# Altium PCB PCB_闹钟_2022-10-18.pcbdoc
Units mil, origin at the board's own origin, x right, y up, seen from the top; angles counter-clockwise.
Board outline 4907.63 x 4907.63 mil, 2 copper layers (Top Layer, Bottom Layer); 31 components, 134 nets, 306 pads, 29 vias.
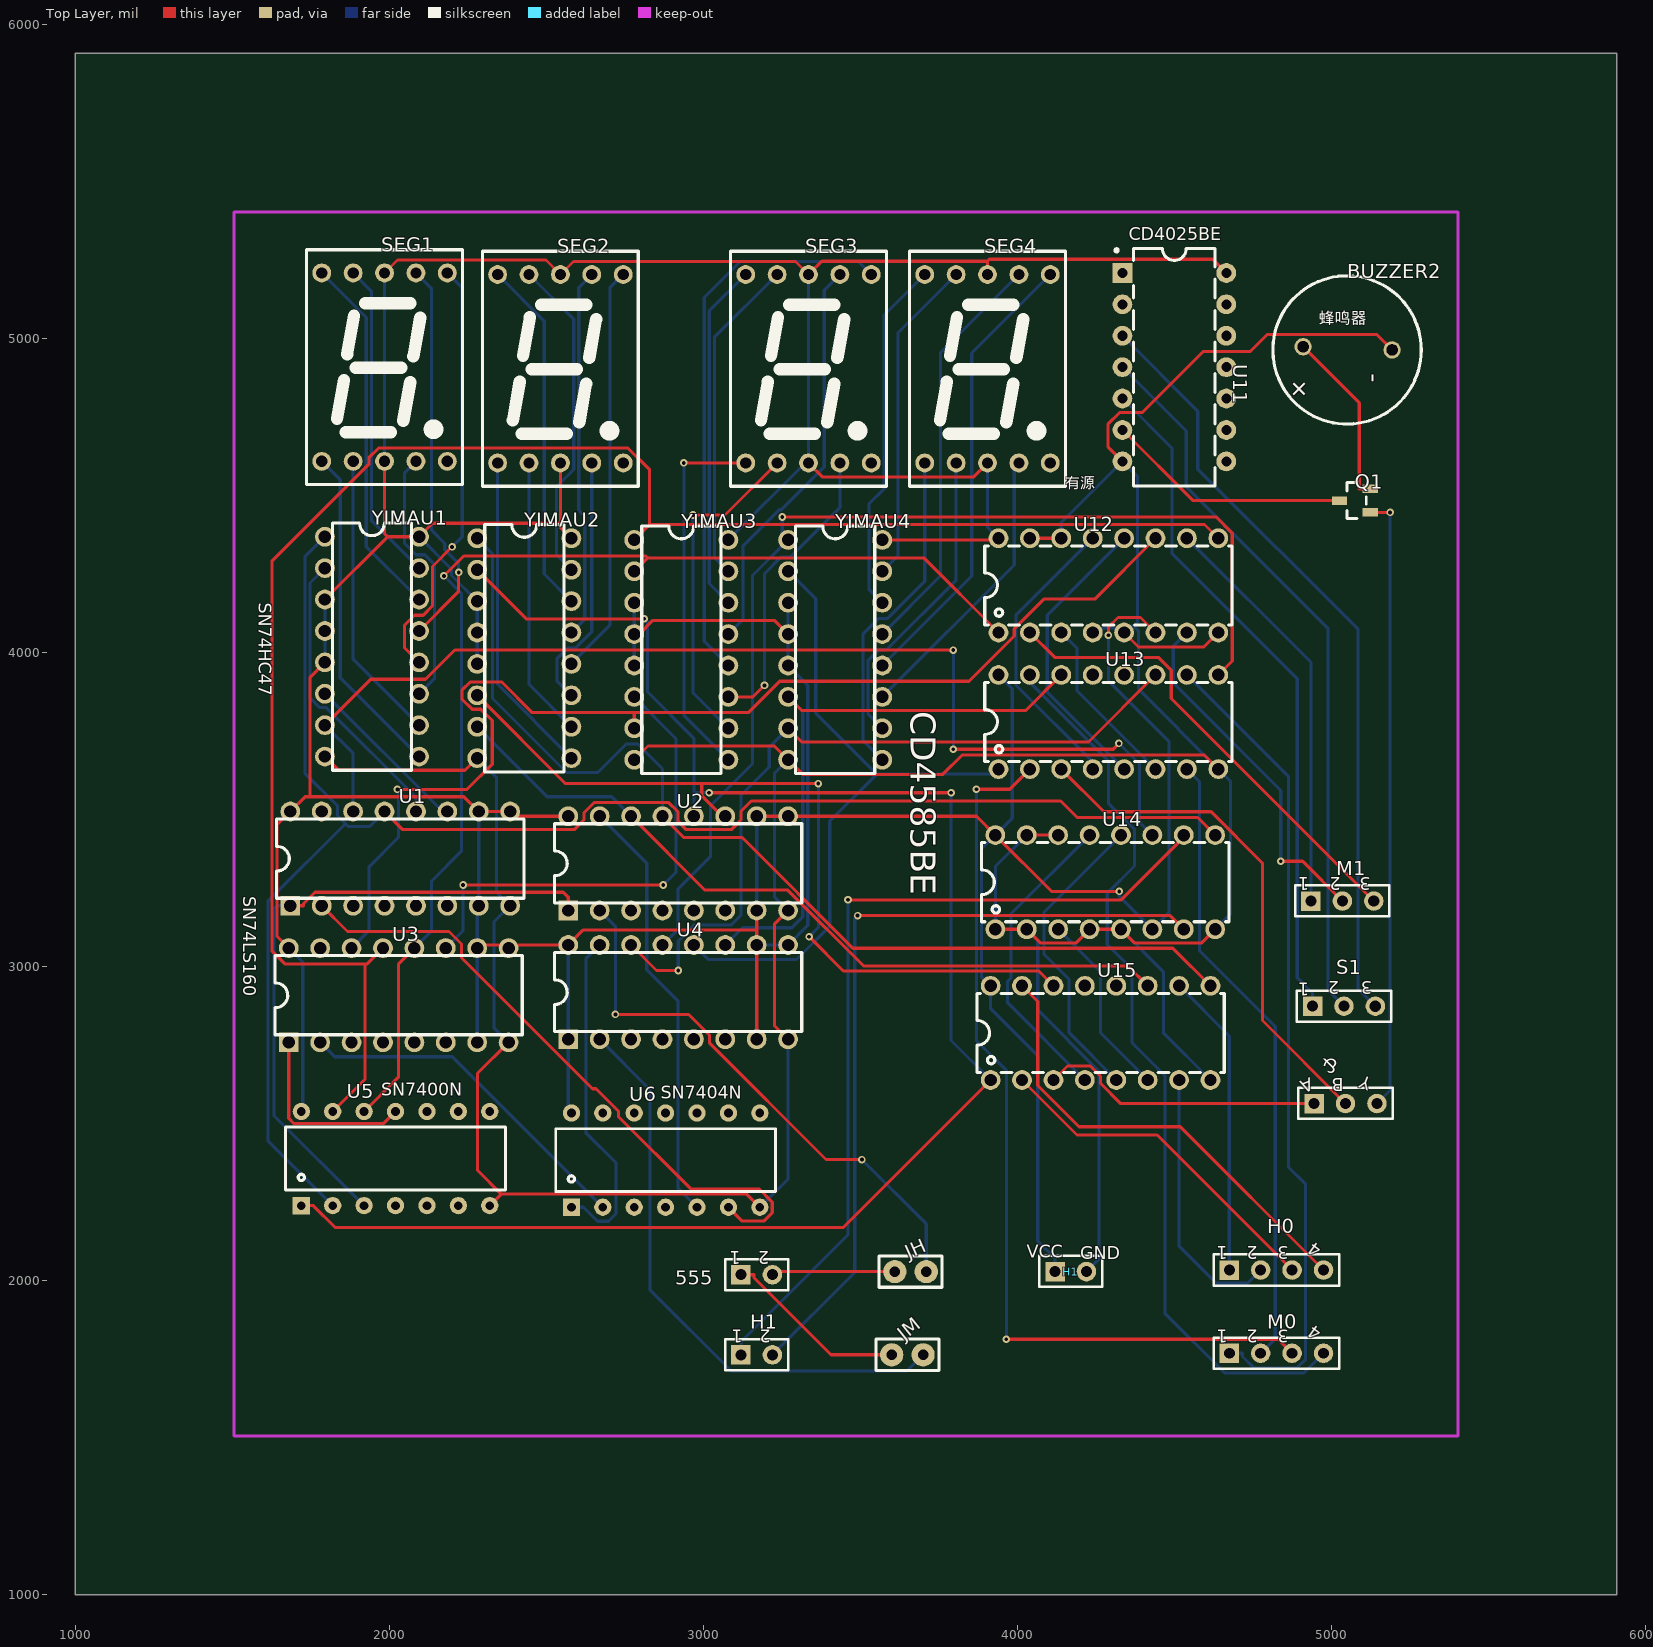
[diagram p0: Top Layer view]
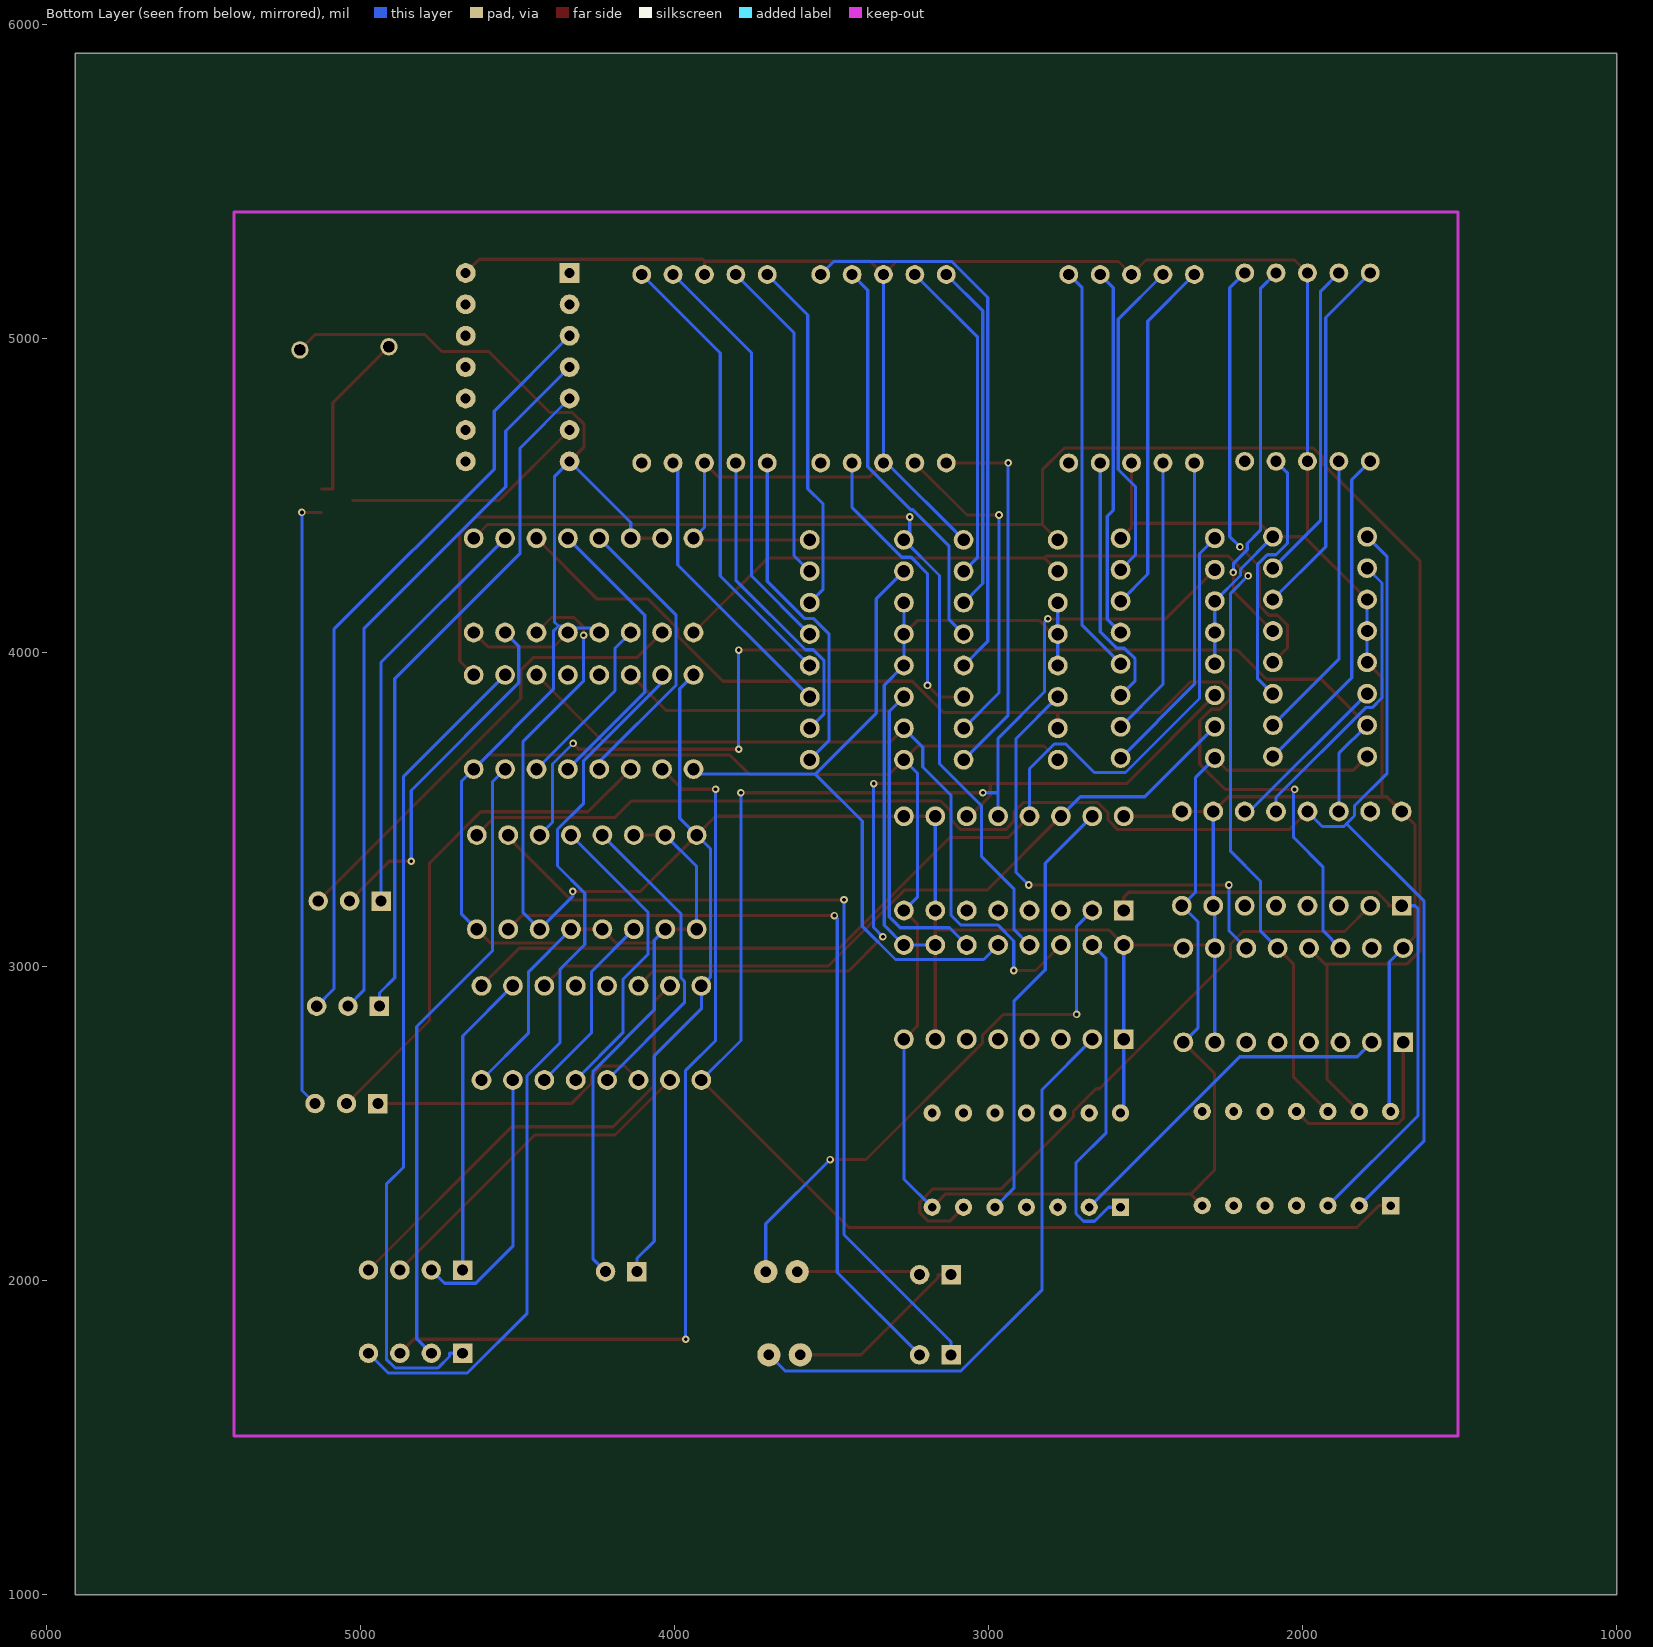
[diagram p1: Bottom Layer view, seen from below]

## Layer stack, top to bottom
Top Solder: solder mask 0.4, Solder Resist, Dk 3.5
Top Layer: signal copper 1.4
Dielectric1: dielectric 12.6, FR-4, Dk 4.8
Bottom Layer: signal copper 1.4
Bottom Solder: solder mask 0.4, Solder Resist, Dk 3.5

## Board outline
5907.63,1000 1000,1000 1000,5907.63 5907.63,5907.63

## Design rules (kind name [scope] priority, off if disabled: settings)
Clearance [All] p1: gap=10 ignorepadtopadclearanceinfootprint=FALSE except(0: Arc-Hole Track-Hole SMDPad-Hole THPad-Hole Via-Hole Fill-Hole Poly-Hole Region-Hole Text-Hole)
PolygonConnect [All] p1: connectstyle=Relief reliefconductorwidth=10 reliefentries=4 polygonreliefangle="90 Angle" airgapwidth=10
RoutingVias [All] p1: holewidth=28 width=50 viastyle="Through Hole" minholewidth=28 minwidth=50 maxholewidth=28 maxwidth=50
SolderMaskExpansion [All] p1: expansion=4 istentingtop=FALSE
Width [All] p1: maxlimit=10 minlimit=10 preferedwidth=10
30 further rules are at their usual default settings.

## Components (designator, comment, footprint, x,y, rotation, side; value= is the part's Value field where it differs from the comment)
555 "HDR-F-2.54_1x2" HDR-F-2.54_1X2 3169.41,2018.54 r0 top
& "HDR-F-2.54_1x3" HDR-F-2.54_1X3 5044.41,2563.54 r0 top
BUZZER2 "有源蜂鸣器3v" ?#1 5049.41,4963.54 r0 top
H0 "HDR-F-2.54_1x4" HDR-F-2.54_1X4 4824.41,2033.54 r0 top
H1 "HDR-F-2.54_1x2" HDR-F-2.54_1X2 4169.41,2028.54 r0 top
H1 "HDR-F-2.54_1x2" HDR-F-2.54_1X2 3169.41,1763.54 r0 top
JH "排针2P" ?#2 3659.41,2028.54 r0 top
JM "排针2P" ?#2 3649.41,1763.54 r0 top
M0 "HDR-F-2.54_1x4" HDR-F-2.54_1X4 4824.41,1768.54 r0 top
M1 "HDR-F-2.54_1x3" HDR-F-2.54_1X3 5034.41,3208.54 r0 top
Q1 "2N3904(SOT-23)" SOT-23-3_L2.9-W1.3-P1.90-LS2.4-TR 5074.41,4483.54 r0 top
S1 "HDR-F-2.54_1x3" HDR-F-2.54_1X3 5039.41,2873.54 r0 top
SEG1 "SEG-TH_0.56×1_Anode" LED-SEG-TH_10P-L12.6-W19.0-P2.54-S15.24-BL 1984.41,4908.54 r0 top
SEG2 "SEG-TH_0.56×1_Anode" LED-SEG-TH_10P-L12.6-W19.0-P2.54-S15.24-BL 2544.41,4903.54 r0 top
SEG3 "SEG-TH_0.56×1_Anode" LED-SEG-TH_10P-L12.6-W19.0-P2.54-S15.24-BL 3334.41,4903.54 r0 top
SEG4 "SEG-TH_0.56×1_Anode" LED-SEG-TH_10P-L12.6-W19.0-P2.54-S15.24-BL 3904.41,4903.54 r0 top
U1 "SN74LS160N" DIP-16#1 2034.41,3343.54 r0 top
U2 "SN74LS160N" DIP-16#1 2919.41,3328.54 r0 top
U3 "SN74LS160N" DIP-16#1 2029.41,2908.54 r0 top
U4 "SN74LS160N" DIP-16#1 2919.41,2918.54 r0 top
U5 "与非门SN7400N" DIP14#1 2019.41,2388.54 r0 top
U6 "非门SN7404N" DIP14#2 2579.41,2233.54 r0 top
U11 "三输入或非CD4025BE" DIP-14_L19.2-W6.6-P2.54-LS10.9-BL 4499.41,4908.54 r270 top
U12 "CD4585BE" DIP-16_L20.0-W6.4-P2.54-LS7.6-BL 4289.41,4213.54 r0 top
U13 "CD4585BE" DIP-16_L20.0-W6.4-P2.54-LS7.6-BL 4289.41,3778.54 r0 top
U14 "CD4585BE" DIP-16_L20.0-W6.4-P2.54-LS7.6-BL 4279.41,3268.54 r0 top
U15 "CD4585BE" DIP-16_L20.0-W6.4-P2.54-LS7.6-BL 4264.41,2788.54 r0 top
YIMAU1 "SN74LS47N" DIP-16#2 1944.41,4018.54 r0 top
YIMAU2 "SN74LS47N" DIP-16#2 2429.41,4013.54 r0 top
YIMAU3 "SN74LS47N" DIP-16#2 2929.41,4008.54 r0 top
YIMAU4 "SN74LS47N" DIP-16#2 3419.41,4008.54 r0 top

## Footprints (in the part's own frame and the unit in brackets; to place one, negate y for a bottom-side part, rotate by r counter-clockwise, add the part's x,y. Pads: shape width x height; smd on the part's side, far side on the other; paste and mask are expansions set on the pad)
DIP14#1 [mil]
  rect 55x55 hole 28: 1(-300,-150)
  round 55 hole 28: 2(-200,-150) 3(-100,-150) 4(0,-150) 5(100,-150) 6(200,-150) 7(300,-150) 8(300,150) 9(200,150) 10(100,150) 11(0,150) 12(-100,150) 13(-200,150) 14(-300,150)
  silkscreen extent -350,-100 350,100
DIP14#2 [mil]
  rect 55x55 hole 28: 1(0,0)
  round 55 hole 28: 2(100,0) 3(200,0) 4(300,0) 5(400,0) 6(500,0) 7(600,0) 8(600,300) 9(500,300) 10(400,300) 11(300,300) 12(200,300) 13(100,300) 14(0,300)
  silkscreen extent -50,50 650,250
DIP-14_L19.2-W6.6-P2.54-LS10.9-BL [mil]
  rect 63x63 hole 32: 1(-300,-165.35)
  round 63 hole 32: 2(-200,-165.35) 3(-100,-165.35) 4(0,-165.35) 5(100,-165.35) 6(200,-165.35) 7(300,-165.35) 8(300,165.35) 9(200,165.35) 10(100,165.35) 11(0,165.35) 12(-100,165.35) 13(-200,165.35) 14(-300,165.35)
  silkscreen extent -378,-189 378,130
DIP-16#1 [mm]
  rect 1.6x1.6 hole 1: 1(-8.89,-3.81)
  round 1.6 hole 1: 2(-6.35,-3.81) 3(-3.81,-3.81) 4(-1.27,-3.81) 5(1.27,-3.81) 6(3.81,-3.81) 7(6.35,-3.81) 8(8.89,-3.81) 9(8.89,3.81) 10(6.35,3.81) 11(3.81,3.81) 12(1.27,3.81) 13(-1.27,3.81) 14(-3.81,3.81) 15(-6.35,3.81) 16(-8.89,3.81)
  silkscreen extent -10,-3.2 10,3.2
DIP-16#2 [mm]
  round 1.6 hole 1: 1(-3.81,8.89) 2(-3.81,6.35) 3(-3.81,3.81) 4(-3.81,1.27) 5(-3.81,-1.27) 6(-3.81,-3.81) 7(-3.81,-6.35) 8(-3.81,-8.89) 9(3.81,-8.89) 10(3.81,-6.35) 11(3.81,-3.81) 12(3.81,-1.27) 13(3.81,1.27) 14(3.81,3.81) 15(3.81,6.35) 16(3.81,8.89)
  silkscreen extent -3.2,-10 3.2,10
DIP-16_L20.0-W6.4-P2.54-LS7.6-BL [mm]
  round 1.6 hole 1: 1(-8.89,-3.81) 2(-6.35,-3.81) 3(-3.81,-3.81) 4(-1.27,-3.81) 5(1.27,-3.81) 6(3.81,-3.81) 7(6.35,-3.81) 8(8.89,-3.81) 9(8.89,3.81) 10(6.35,3.81) 11(3.81,3.81) 12(1.27,3.81) 13(-1.27,3.81) 14(-3.81,3.81) 15(-6.35,3.81) 16(-8.89,3.81)
  silkscreen extent -10,-3.2 10,3.2
HDR-F-2.54_1X2 [mil]
  rect 62x62 hole 35: 1(-50,0)
  round 62 hole 35: 2(50,0)
  silkscreen extent -100,-49 100,50
HDR-F-2.54_1X3 [mil]
  rect 62x62 hole 35: 1(-100,0)
  round 62 hole 35: 2(0,0)
  round 62 hole 36: 3(100,0)
  silkscreen extent -150,-49 150,50
HDR-F-2.54_1X4 [mil]
  rect 62x62 hole 35: 1(-150,0)
  round 62 hole 35: 2(-50,0) 3(50,0) 4(150,0)
  silkscreen extent -200,-50 200,50
LED-SEG-TH_10P-L12.6-W19.0-P2.54-S15.24-BL [mil]
  round 60 hole 36: 1(-200,-300) 2(-100,-300) 3(0,-300) 4(100,-300) 5(200,-300) 6(200,300) 7(100,300) 8(0,300) 9(-100,300) 10(-200,300)
  silkscreen extent -248,-374 248,374
SOT-23-3_L2.9-W1.3-P1.90-LS2.4-TR [mm]
  rect 1.25x0.7 smd: 1(1.25,0.95) 2(1.25,-0.95) 3(-1.25,0)
  silkscreen extent -0.65,-1.46 0.9,1.46
?#1 [mm]
  round 1.4 hole 0.9 slot 0.905 at 0 deg: +(-3.556,0.254) -(3.644,0)
  silkscreen extent -6,-6 6,6
?#2 [mm]
  round 1.88 hole 0.864: 1(-1.27,0) 2(1.27,0)
  silkscreen extent -2.54,-1.27 2.54,1.27

## Via types
v1: diameter 24, hole 12, Top Layer to Bottom Layer, 29 vias

## Nets (pads, with @x,y where several pads share a name; then routed paths per layer and width w, separated by ;. In a path a pad name is that pad's centre, name@x,y a point inside that pad or via, vN(x,y) a via of type N, cw(c..) or ccw(c..) an arc to the next point about the centre after c; other vN are vias at no path point)
GND: BUZZER2.- H1.2@4219.41,2028.54 U1.8 U2.8 U3.8 U4.8 U5.7 U6.7 U11.7 U12.4 U12.5 U12.8 U12.14 U12.15 U13.8 U14.1 U14.2 U14.4 U14.5 U14.8 U14.14 U14.15 U15.8 YIMAU1.8 YIMAU2.8 YIMAU3.8 YIMAU4.8 | length 13223.9
  Top Layer w10: YIMAU1.8 1838.16,3624.79 2240.66,3624.79 YIMAU2.8 ; U5.7 2356.1,2275.23 ; U3.8 2280.55,2659.68 2280.55,2350.78 2356.1,2275.23 ; YIMAU3.8 2823.16,3702.29 3225.66,3702.29 YIMAU4.8 3316.24,3611.71 3762.3,3611.71 3824.1,3673.51 4594.44,3673.51 U13.8 ; U6.7 3137.72,2275.23 2356.1,2275.23 ; U4.8 3225.66,2812.29 3225.66,3134.79 U2.8 ; U14.1 U14.2 4073.52,3074.43 4185.3,3074.43 U14.4 U14.5 4373.52,3074.43 4585.3,3074.43 U14.8 ; U14.15 U14.14 ; U12.15 U12.14 ; U11.7 4288.6,4654 4288.6,4727.91 4324.53,4763.84 4396.23,4763.84 4590.93,4958.54 4740.88,4958.54 4795.05,5012.71 5143.7,5012.71 BUZZER2.- ; U12.5 4385.37,4017.58 4593.45,4017.58 U12.8
  Bottom Layer w10: YIMAU2.8 2340.66,3602.29 2340.66,3237.29 U1.8 2332.69,3141.82 2332.69,2805.26 U3.8 ; U6.7 3269.41,2323.54 U4.8 ; U2.8 3225.66,3222.29 3225.66,3614.79 YIMAU4.8 ; U14.1 3929.41,3318.54 U14.15 ; U14.2 4064.41,3083.54 4064.41,2861.79 4259.2,2667 4259.2,2068.33 H1.2@4219.41,2028.54 ; U12.14 4139.41,4413.89 U11.7 4382.49,4560.11 4382.49,4097.18 4369.47,4084.16 ; U12.4 4253.44,4077.57 4325.38,4077.57 U12.5 4360.03,4084.16 4369.47,4084.16 ; U14.5 4464.41,2983.54 4464.41,2788.54 U15.8 ; U14.8 4678.63,3167.76 4678.63,3589.32 U13.8 4385.51,3882.44 4385.51,4068.12 4369.47,4084.16
J1_1: 555.2 JH.1 | length 394.1
  Top Layer w10: 555.2 3229.41,2028.54 JH.1
J2_1: 555.1 JM.1 | length 591.8
  Top Layer w10: 555.1 3161.42,2018.54 3161.42,2008.04 3405.92,1763.54 JM.1
J2_2: JM.2 U4.2 | length 1863
  Bottom Layer w10: U4.2 2829.41,2608.54 2829.41,1970.35 3087.93,1711.83 3647.7,1711.83 JM.2
Q1_1: BUZZER2.+ Q1.1 | length 562.2
  Top Layer w10: BUZZER2.+ 5087.99,4794.96 5087.99,4520.94 Q1.1
Q1_2: &.3 Q1.2 | length 1962.4
  Top Layer w10: Q1.2 5159.23,4446.14 v1(5186.16,4446.14)
  Bottom Layer w10: &.3 5186.16,2605.29 v1(5186.16,4446.14)
S$54: 
S$56: 
S$59: 
SEG1_1: SEG1.1 YIMAU1.9 | length 1068.4
  Bottom Layer w10: SEG1.1 1843.35,4549.6 1843.35,3919.6 YIMAU1.9
SEG1_2: SEG1.2 YIMAU1.10 | length 927
  Bottom Layer w10: SEG1.2 1884.41,3978.54 YIMAU1.10
SEG1_4: SEG1.4 YIMAU1.11 | length 831
  Bottom Layer w10: SEG1.4 2048.46,4572.59 2048.46,4347.08 2084.45,4311.09 2112.04,4311.09 2143.79,4279.34 2143.79,3917.92 YIMAU1.11
SEG1_5: SEG1.5
SEG1_6: SEG1.6 YIMAU1.12 | length 1371.2
  Top Layer w10: YIMAU1.12 2048.06,4014.89 2048.06,4087 2079.6,4118.54 2107.3,4118.54 2136.97,4148.21 2136.97,4273.93 v1(2199.3,4336.26)
  Bottom Layer w10: SEG1.6 2231.82,5161.13 2231.82,4368.78 v1(2199.3,4336.26)
SEG1_7: SEG1.7 YIMAU1.13 | length 1248.6
  Top Layer w10: YIMAU1.13 2220.46,4194.59 v1(2220.46,4254.81)
  Bottom Layer w10: SEG1.7 2134.41,5158.54 2134.41,4388.73 2176.25,4346.89 2176.25,4326.72 2220.46,4282.51 v1(2220.46,4254.81)
SEG1_9: SEG1.9 YIMAU1.15 | length 1027
  Bottom Layer w10: SEG1.9 1942.43,5150.52 1942.43,4420.52 YIMAU1.15
SEG1_10: SEG1.10 YIMAU1.14 | length 1168.4
  Bottom Layer w10: SEG1.10 1926.37,5066.58 1926.37,4336.58 YIMAU1.14
SEG2_1: SEG2.1 YIMAU2.9 | length 1037.3
  Bottom Layer w10: SEG2.1 2344.41,3898.54 YIMAU2.9
SEG2_2: SEG2.2 YIMAU2.10 | length 895.9
  Bottom Layer w10: SEG2.2 2444.41,3898.54 YIMAU2.10
SEG2_4: SEG2.4 YIMAU2.11 | length 819.5
  Bottom Layer w10: YIMAU2.11 2533.32,3909.63 2533.32,3979.47 2567.39,4013.54 2591.91,4013.54 2644.41,4066.04 SEG2.4
SEG2_5: SEG2.5
SEG2_6: SEG2.6 YIMAU2.12 | length 1308.3
  Bottom Layer w10: YIMAU2.12 2702.1,4086.23 2702.1,5161.23 SEG2.6
SEG2_7: SEG2.7 YIMAU2.13 | length 1182.9
  Bottom Layer w10: YIMAU2.13 2622.1,4106.23 2622.1,4434.16 2602.79,4453.47 2602.79,5161.92 SEG2.7
SEG2_9: SEG2.9 YIMAU2.15 | length 1041.2
  Bottom Layer w10: SEG2.9 2586.73,5061.22 2586.73,4582.84 2532.13,4528.24 2532.13,4310.82 YIMAU2.15
SEG2_10: SEG2.10 YIMAU2.14 | length 1137.3
  Bottom Layer w10: SEG2.10 2492.99,5054.96 2492.99,4249.96 YIMAU2.14
SEG3_5: SEG3.5
SEG4_5: SEG4.5
U1_3: U1.3
U1_4: U1.4
U1_5: U1.5
U1_6: U1.6
U1_11: U1.11 YIMAU1.6 | length 545.3
  Bottom Layer w10: YIMAU1.6 2169.41,3493.54 U1.11
U1_12: U1.12 YIMAU1.2 | length 946.3
  Bottom Layer w10: YIMAU1.2 1747.09,4221.22 1747.09,3855.69 1778.56,3824.22 1798.93,3824.22 2084.41,3538.74 U1.12
U1_14: U1.14 U14.11 YIMAU1.7 | length 3599.1
  Top Layer w10: YIMAU1.7 1940.42,3914.55 2115.03,3914.55 2208.23,4007.75 v1(3795.66,4007.75) ; v1(3795.66,3692.06) 4304.7,3692.06 v1(4322.98,3710.34)
  Bottom Layer w10: YIMAU1.7 1884.41,3678.54 U1.14 ; v1(3795.66,3692.06) v1(3795.66,4007.75) ; v1(4322.98,3710.34) 4388.52,3644.8 4388.52,3459.43 U14.11
U1_15: U1.15
U2_2: JH.2 U2.2 | length 1784.3
  Top Layer w10: v1(2719.42,2847.27) 2952.54,2847.27 3019.41,2780.4 3019.41,2756.16 3390.17,2385.4 v1(3504.52,2385.4)
  Bottom Layer w10: U2.2 2719.42,3128.53 v1(2719.42,2847.27) ; v1(3504.52,2385.4) 3709.41,2180.51 JH.2
U2_3: U2.3
U2_4: U2.4
U2_5: U2.5
U2_6: U2.6
U3_3: U3.3
U3_4: U3.4
U3_5: U3.5
U3_6: U3.6
U3_15: U3.15
U4_3: U4.3
U4_4: U4.4
U4_5: U4.5
U4_6: U4.6
U4_11: U4.11 U13.14 YIMAU4.6 | length 1937.9
  Top Layer w10: YIMAU4.6 3312.55,3815.4 4026.27,3815.4 U13.14
  Bottom Layer w10: U4.11 3124.41,3123.54 3281,3123.54 3316.02,3158.56 3316.02,3811.93 YIMAU4.6
U4_12: U4.12 U13.1 YIMAU4.2 | length 2199.4
  Bottom Layer w10: U4.12 3015.69,3022.26 3296.38,3022.26 3402.11,3127.99 3402.11,3463.51 3551.41,3612.81 ; YIMAU4.2 3357.34,4170.61 3357.34,3806.88 3551.41,3612.81 ; U13.1 3923.68,3612.81 3551.41,3612.81
U4_13: U4.13 U13.9 YIMAU4.1 | length 3460.7
  Top Layer w10: v1(3250.72,4431.42) 4632.58,4431.42 4683.89,4380.11 4683.89,3973.02 U13.9
  Bottom Layer w10: U4.13 2919.41,3118.54 2919.41,3247.44 3021.79,3349.82 3021.79,3510.94 3156.15,3645.3 3156.15,4245.28 YIMAU4.1 3250.72,4377.23 v1(3250.72,4431.42)
U4_14: U4.14 U13.11 YIMAU4.7 | length 2445.5
  Top Layer w10: U4.14 2850.58,2987.37 v1(2919.43,2987.37) ; YIMAU4.7 3312.84,3715.11 4225.98,3715.11 U13.11
  Bottom Layer w10: v1(2919.43,2987.37) 2919.43,3081.05 2971.07,3132.69 3089.35,3132.69 3119.41,3162.75 3119.41,3545.31 3209.6,3635.5 3209.6,3698.73 YIMAU4.7
U5_2: U1.13 U5.2 U14.9 YIMAU1.1 | length 5414.6
  Top Layer w10: U1.13 2041.97,3435.98 2588.47,3435.98 2619.33,3466.84 2619.33,3489.61 2651.51,3521.79 2889.54,3521.79 2919.33,3492 2919.33,3462 2945.34,3435.99 3088.5,3435.99 3119.37,3466.86 3119.37,3493.91 3152.36,3526.9 4137.36,3526.9 4189.74,3474.52 4573.43,3474.52 U14.9
  Bottom Layer w10: YIMAU1.1 1730.68,4304.81 1730.68,3615.51 1834.41,3511.78 1834.41,3480.36 1860.26,3454.51 ; U5.2 1613.03,2444.92 1613.03,3207.28 1860.26,3454.51 ; U1.13 1936.76,3445.89 1868.88,3445.89 1860.26,3454.51
U5_3: U1.1 U2.1 U5.3 | length 2076.3
  Top Layer w10: U1.1 1726.91,3193.54 1726.91,3200.49 1762.97,3236.55 2553.91,3236.55 2569.41,3221.05 U2.1
  Bottom Layer w10: U1.1 1641.9,3193.54 1632.19,3183.83 1632.19,2525.76 U5.3
U5_4: U5.4
U5_5: U5.5
U5_6: U5.6
U5_8: U5.8
U5_9: U5.9
U5_10: U5.10
U5_11: U3.1 U5.11 | length 604.9
  Top Layer w10: U3.1 1679.41,2516.53 1696.03,2499.91 1980.78,2499.91 U5.11
U5_12: U3.12 U5.12 U12.1 YIMAU3.2 | length 3809.7
  Top Layer w10: U5.12 2029.41,2648.54 2029.41,3008.54 U3.12 ; v1(2173.64,4243.74) 2237.09,4307.19 2816.02,4307.19 2822.04,4301.17 ; YIMAU3.2 2822.04,4301.17 ; U12.1 3701.78,4301.17 2822.04,4301.17
  Bottom Layer w10: U3.12 2134.41,3113.54 2134.41,3272.26 2229.13,3366.98 2229.13,4188.25 v1(2173.64,4243.74)
U5_13: U3.13 U5.13 U12.9 YIMAU3.1 | length 5611
  Top Layer w10: U5.13 1922.53,2641.66 1922.53,3008.54 ; U3.13 1929.41,3008.54 1922.53,3008.54 ; YIMAU3.1 2828.34,4407.47 ; U12.9 4595.48,4407.47 2828.34,4407.47 ; 1922.53,3008.54 1667.07,3008.54 1625.6,3050.01 1625.6,4290.3 1934.41,4599.11 1934.41,4619.99 1965.73,4651.31 2759.18,4651.31 2828.34,4582.15 2828.34,4407.47
U6_1: U4.15 U6.1 | length 1083.6
  Bottom Layer w10: U6.1 2617.92,2233.54 2662.38,2189.08 2697.47,2189.08 2721.42,2213.03 2721.42,2374.95 2625.66,2470.71 2625.66,3024.79 U4.15
U6_2: U3.2 U6.2 | length 1117.5
  Bottom Layer w10: U3.2 1825.45,2712.5 2200.45,2712.5 U6.2
U6_3: U6.3
U6_4: U6.4
U6_5: U2.15 U6.5 | length 1373.4
  Bottom Layer w10: U2.15 2819.41,3328.54 2819.41,2989.82 2919.41,2889.82 2919.41,2293.54 U6.5
U6_6: U1.2 U6.6 | length 2064
  Top Layer w10: U1.2 1866.4,3111.55 2189.76,3111.55 2229.41,3071.9 2229.41,3027.98 2646.61,2610.78 2657.87,2610.78 2729.41,2539.24 2729.41,2521.7 2959.11,2292 3176.7,2292 3219,2249.7 3219,2216.46 3191.83,2189.29 3123.66,2189.29 U6.6
U6_8: U6.8
U6_9: U6.9
U6_10: U6.10
U6_11: U6.11
U6_12: U6.12
U6_13: U6.13
U11_1: U11.1
U11_2: U11.2
U11_3: S1.3 U11.3 | length 2468.6
  Bottom Layer w10: U11.3 4573.96,4768.64 4573.96,4583.83 5084.41,4073.38 5084.41,2928.54 S1.3
U11_4: S1.2 U11.4 | length 2327.2
  Bottom Layer w10: U11.4 4537.35,4705.25 4537.35,4527.77 4988.99,4076.13 4988.99,2923.96 S1.2
U11_5: S1.1 U11.5 | length 2185.7
  Bottom Layer w10: U11.5 4491.35,4651.25 4491.35,4316.03 4890.72,3916.66 4890.72,2964.24 4939.41,2915.55 S1.1
U11_6: Q1.3 U11.6 | length 784.3
  Top Layer w10: U11.6 4559.06,4483.54 Q1.3
U11_8: U11.8
U11_9: U11.9
U11_10: U11.10
U11_11: U11.11
U11_12: U11.12
U11_13: U11.13
U12_2: M1.3 U12.2 | length 1501.6
  Top Layer w10: U12.2 4118.41,3984.54 4447.89,3984.54 4489.41,3943.02 4489.41,3853.54 M1.3
U12_7: M1.2 U12.7 | length 1137
  Top Layer w10: v1(4838.33,3335.16) 4907.79,3335.16 M1.2
  Bottom Layer w10: U12.7 4495.66,4019.79 4495.66,3903.21 4838.33,3560.54 v1(4838.33,3335.16)
U12_10: M1.1 U12.10 | length 1318.6
  Bottom Layer w10: U12.10 4934.41,3968.54 M1.1
U13_2: M0.3 U13.2 | length 2916.4
  Top Layer w10: v1(3869.02,3564.48) 3975.35,3564.48 U13.2 ; v1(3964.39,1812.95) 4830,1812.95 M0.3
  Bottom Layer w10: v1(3869.02,3564.48) 3869.02,2764.57 3964.39,2669.2 v1(3964.39,1812.95)
U13_3: &.2 U13.3 | length 1639.8
  Top Layer w10: U13.3 4275.3,3492.65 4616.65,3492.65 4780.04,3329.26 4780.04,2827.91 &.2
U13_4: U12.13 U13.4 | length 937.6
  Bottom Layer w10: U13.4 4239.41,3651.78 3994.82,3896.37 3994.82,4118.95 U12.13
U13_5: U12.12 U13.5 | length 937.8
  Bottom Layer w10: U13.5 4094.65,3873.3 4094.65,4118.78 U12.12
U13_6: U12.3 U13.6 | length 559.3
  Bottom Layer w10: U12.3 4189.41,4013.54 4189.41,3878.54 U13.6
U13_7: M0.2 U13.7 | length 1995.5
  Bottom Layer w10: U13.7 4579.41,3588.54 4579.41,3050.05 4820.5,2808.96 4820.5,1814.63 M0.2
U13_10: M0.1 U13.10 | length 2615.7
  Bottom Layer w10: U13.10 4862.49,3605.46 4862.49,2361.7 4917.35,2306.84 4917.35,1749.08 4890.13,1721.86 4752.6,1721.86 4716.42,1758.04 4716.42,1768.54 M0.1
U13_12: U13.12
U13_13: U13.13
U13_15: M0.4 U13.15 | length 2892.6
  Bottom Layer w10: U13.15 4039.41,3905.3 4289.41,3655.3 4289.41,3519.82 4372.46,3436.77 4372.46,3320.27 4285.74,3233.55 4285.74,3070.24 4364.39,2991.59 4364.39,2757.66 4469.29,2652.76 4469.29,1895.76 4659.41,1705.64 4911.51,1705.64 M0.4
U14_7: H1.2@3219.41,1763.54 U14.7 | length 2567.6
  Top Layer w10: v1(3490.8,3162.11) 4485.84,3162.11 U14.7
  Bottom Layer w10: H1.2@3219.41,1763.54 3481.47,2025.6 3481.47,3152.78 v1(3490.8,3162.11)
U14_10: H1.1@3119.41,1763.54 U14.10 | length 2748.4
  Top Layer w10: v1(3460.18,3212.37) 4329.79,3212.37 4529.41,3411.99 U14.10
  Bottom Layer w10: H1.1@3119.41,1763.54 3119.41,1805.55 3460.18,2146.32 v1(3460.18,3212.37)
U15_1: U2.12 U5.1 U15.1 YIMAU2.2 | length 5495.1
  Top Layer w10: U5.1 1757.92,2238.54 1828.07,2168.39 3444.26,2168.39 U15.1 ; YIMAU2.2 2435.83,4107.12 v1(2810.95,4107.12) ; v1(3017.77,3553.19) v1(3788.33,3553.19)
  Bottom Layer w10: v1(2810.95,4107.12) 2821.97,4096.1 2821.97,3874 2969.41,3726.56 2969.41,3553.19 ; U2.12 2969.41,3553.19 ; v1(3017.77,3553.19) 2969.41,3553.19 ; v1(3788.33,3553.19) 3788.33,2764.62 U15.1
U15_2: H0.3 U15.2 | length 1110.6
  Top Layer w10: U15.2 4189.41,2463.54 4444.41,2463.54 H0.3
U15_3: &.1 U15.3 | length 911.1
  Top Layer w10: U15.3 4158.97,2683.1 4231.57,2683.1 4264.39,2650.28 4264.39,2627.85 4328.7,2563.54 &.1
U15_4: U14.13 U15.4 | length 989.9
  Bottom Layer w10: U15.4 3968.53,2884.42 3968.53,2952.84 3979.41,2963.72 3979.41,3168.54 U14.13
U15_5: U14.12 U15.5 | length 976.6
  Bottom Layer w10: U15.5 4164.41,2788.54 4164.41,2958.48 4084.65,3038.24 4084.65,3173.78 U14.12
U15_6: U14.3 U15.6 | length 598.1
  Bottom Layer w10: U14.3 4264.41,2983.54 4264.41,2788.54 U15.6
U15_7: H0.2 U15.7 | length 855.4
  Bottom Layer w10: U15.7 4514.41,2109.42 4632.35,1991.48 4732.35,1991.48 H0.2
U15_9: U2.13 U15.9 YIMAU2.1 | length 3359.1
  Top Layer w10: U2.13 2936.95,3411 3123.17,3411 3475.8,3058.37 4494.58,3058.37 U15.9
  Bottom Layer w10: YIMAU2.1 2328.35,4314.6 2328.35,3853.33 2563.94,3617.74 2662.87,3617.74 2753.67,3708.54 2790.32,3708.54 2869.41,3629.45 U2.13
U15_10: H0.1 U15.10 | length 971.3
  Bottom Layer w10: U15.10 4674.41,2778.54 H0.1
U15_11: U2.14 U15.11 YIMAU2.7 | length 2476.7
  Top Layer w10: U2.14 3004.78,3243.17 3268.23,3243.17 3509.81,3001.59 4351.36,3001.59 U15.11
  Bottom Layer w10: YIMAU2.7 2502.46,3540.49 2707.46,3540.49 U2.14
U15_12: U15.12
U15_13: U15.13
U15_14: U2.11 U15.14 YIMAU2.6 | length 2686.1
  Top Layer w10: YIMAU2.6 2560.5,3582.45 2994.47,3582.45 ; U2.11 3059.82,3478.54 2994.47,3543.89 2994.47,3582.45 ; v1(3336.31,3094.8) 3445.58,2985.53 4067.42,2985.53 U15.14 ; v1(3365.8,3582.45) 2994.47,3582.45
  Bottom Layer w10: v1(3336.31,3094.8) 3365.8,3124.29 v1(3365.8,3582.45)
U15_15: H0.4 U15.15 | length 1491.5
  Top Layer w10: U15.15 4064.41,2888.54 4064.41,2621.09 4195.77,2489.73 4518.22,2489.73 H0.4
VCC: H1.1@4119.41,2028.54 SEG1.3 SEG1.8 SEG2.3 SEG2.8 SEG3.3 SEG3.8 SEG4.3 SEG4.8 U1.7 U1.9 U1.10 U1.16 U2.7 U2.9 U2.10 U2.16 U3.7 U3.9 U3.10 U3.16 U4.1 U4.7 U4.9 U4.10 U4.16 U5.14 U6.14 U11.14 U12.6 U12.16 U13.16 U14.6 U14.16 U15.16 YIMAU1.3 YIMAU1.4 YIMAU1.5 YIMAU1.16 YIMAU2.3 YIMAU2.4 YIMAU2.5 YIMAU2.16 YIMAU3.3 YIMAU3.4 YIMAU3.5 YIMAU3.16 YIMAU4.3 YIMAU4.4 YIMAU4.5 YIMAU4.16 | length 19642.7
  Top Layer w10: U3.16 1641.85,3096.1 1641.85,3450.98 U1.16 1731.63,3540.76 1747.32,3540.76 ; YIMAU1.5 1747.32,3921.45 1747.32,3540.76 ; YIMAU1.3 1994.41,4368.54 ; SEG1.3 1984.41,4378.54 1994.41,4368.54 ; SEG1.8 2025.49,5249.62 2498.33,5249.62 SEG2.8 2585.98,5245.11 3292.84,5245.11 SEG3.8 3376.85,5245.98 3904.41,5245.98 ; U3.10 2289.41,3068.54 U3.9@2391.07,3068.54 ; U3.9 2389.41,3068.54 U3.9@2391.07,3068.54 ; SEG2.3 2544.41,4411.35 ; U2.16 2399.41,3478.54 U1.9 U1.10 2237.19,3540.76 1747.32,3540.76 ; YIMAU2.16 2544.41,4398.54 2544.41,4411.35 ; YIMAU3.4 2794.98,4058.54 2838.73,4102.29 3225.66,4102.29 YIMAU4.4 ; U4.7 U4.10 3169.41,3116.67 ; U2.7 3169.41,3116.67 ; U2.10 U2.9 3869.41,3478.54 U14.16 4108.99,3238.96 v1(4323.77,3238.96) ; SEG3.3 3379.41,4558.54 3859.41,4558.54 SEG4.3 ; YIMAU4.16 3934.41,4358.54 U12.16 ; SEG4.8 3904.41,5245.98 ; v1(4289.41,4054.52) 4289.41,4080.74 4319.87,4111.2 4391.75,4111.2 U12.6 ; U11.14 4621.26,5252.04 3910.47,5252.04 3904.41,5245.98 ; 1994.41,4368.54 YIMAU1.16 2137.22,4411.35 2544.41,4411.35 ; U3.9@2391.07,3068.54 U4.16 2617.54,3116.67 3169.41,3116.67
  Bottom Layer w10: U3.16 1723.74,3014.21 1723.74,2542.87 U5.14 ; YIMAU1.5 YIMAU1.4 YIMAU1.3 ; SEG1.3 SEG1.8 ; YIMAU1.16 2197.41,4265.54 2197.41,4245.26 2279.13,4163.54 YIMAU2.3 YIMAU2.4 YIMAU2.5 ; U3.7 U3.10 2279.41,3188.54 U1.7 U1.10 ; U4.16 U4.1 2569.41,2543.54 U6.14 ; YIMAU3.5 YIMAU3.4 YIMAU3.3 ; YIMAU3.16 3324.41,4603.54 SEG3.3 SEG3.8 ; U4.10 U4.9 3332.08,3131.21 3332.08,3895.87 YIMAU4.5 YIMAU4.4 YIMAU4.3 ; U2.7 U2.10 ; SEG4.3 3904.41,4398.54 U12.16 ; U13.16 3983.16,3884.79 3983.16,3472.29 U14.16 3885.07,3374.2 3885.07,2967.88 U15.16 3914.41,2865.3 4064.41,2715.3 4064.41,2125.55 4119.41,2070.55 H1.1@4119.41,2028.54 ; v1(4289.41,4054.52) 4289.41,3909.46 4481.97,3716.9 4481.97,3171.1 U14.6 4323.77,3224.18 v1(4323.77,3238.96)
YIMAU3_6: U3.11 YIMAU3.6 | length 1532.2
  Top Layer w10: v1(2234.41,3259.6) v1(2872.03,3259.6)
  Bottom Layer w10: U3.11 2234.41,3113.54 v1(2234.41,3259.6) ; YIMAU3.6 2912.34,3725.61 2912.34,3299.91 v1(2872.03,3259.6)
YIMAU3_7: U3.14 U12.11 YIMAU3.7 | length 3748.6
  Top Layer w10: v1(2025.31,3563.89) 2246.88,3563.89 2327.25,3644.26 2327.25,3783.23 2291.26,3819.22 2263.56,3819.22 2230.82,3851.96 2230.82,3879.23 2258.1,3906.51 2356.68,3906.51 2454.65,3808.54 2779.41,3808.54 ; YIMAU3.7 2779.41,3808.54 ; U12.11 4245.69,4169.82 4083.99,4169.82 3989.41,4075.24 3989.41,4052.31 3845.64,3908.54 3242.75,3908.54 3142.75,3808.54 2779.41,3808.54
  Bottom Layer w10: U3.14 1934.41,3113.54 1934.41,3316.63 2028.52,3410.74 2028.52,3560.68 v1(2025.31,3563.89)
YIMAU3_9: SEG3.1 YIMAU3.9 | length 1200.7
  Top Layer w10: v1(2937.52,4603.54) SEG3.1
  Bottom Layer w10: v1(2937.52,4603.54) 2937.52,3800.43 YIMAU3.9
YIMAU3_10: SEG3.2 YIMAU3.10 | length 1062.5
  Top Layer w10: v1(2966.56,4437.74) 3068.61,4437.74 SEG3.2
  Bottom Layer w10: v1(2966.56,4437.74) 2966.56,3871.39 YIMAU3.10
YIMAU3_11: SEG3.4 YIMAU3.11 | length 955.4
  Top Layer w10: YIMAU3.11 3157.68,3858.54 v1(3194.3,3895.16)
  Bottom Layer w10: v1(3194.3,3895.16) 3194.3,4250.88 3246.51,4303.09 3276.34,4303.09 3434.4,4461.15 SEG3.4
YIMAU3_12: SEG3.6 YIMAU3.12 | length 1800.4
  Bottom Layer w10: YIMAU3.12 3002.42,4035.53 3002.42,5130.45 3116.94,5244.97 3492.98,5244.97 SEG3.6
YIMAU3_13: SEG3.7 YIMAU3.13 | length 1296
  Bottom Layer w10: YIMAU3.13 3126.37,4105.5 3126.37,4339.67 3241.17,4454.47 3247.93,4454.47 3384.41,4590.95 3384.41,5153.54 SEG3.7
YIMAU3_14: SEG3.10 YIMAU3.14 | length 1118.3
  Bottom Layer w10: YIMAU3.14 3018.48,4219.47 3018.48,5087.61 SEG3.10
YIMAU3_15: SEG3.9 YIMAU3.15 | length 1046.2
  Bottom Layer w10: YIMAU3.15 3034.71,4303.24 3034.71,5003.84 SEG3.9
YIMAU4_9: SEG4.1 YIMAU4.9 | length 1069.3
  Bottom Layer w10: YIMAU4.9 3507.4,3720.55 3507.4,4058.39 3557.55,4108.54 3586.51,4108.54 3704.41,4226.44 SEG4.1
YIMAU4_10: SEG4.2 YIMAU4.10 | length 994.6
  Bottom Layer w10: YIMAU4.10 3524.12,3803.83 3524.12,3975.11 3557.55,4008.54 3582.79,4008.54 3804.41,4230.16 SEG4.2
YIMAU4_11: SEG4.4 YIMAU4.11 | length 925.2
  Bottom Layer w10: YIMAU4.11 3989.41,4278.54 3989.41,4588.54 SEG4.4
YIMAU4_12: SEG4.6 YIMAU4.12 | length 1466.6
  Bottom Layer w10: YIMAU4.12 3854.41,4243.54 3854.41,4953.54 SEG4.6
YIMAU4_13: SEG4.7 YIMAU4.13 | length 1325.2
  Bottom Layer w10: YIMAU4.13 3754.41,4243.54 3754.41,4953.54 SEG4.7
YIMAU4_14: SEG4.10 YIMAU4.14 | length 1136.3
  Bottom Layer w10: YIMAU4.14 3526.7,4201.25 3526.7,4472.82 3575.47,4521.59 3575.47,5074.6 SEG4.10
YIMAU4_15: SEG4.9 YIMAU4.15 | length 1042.3
  Bottom Layer w10: YIMAU4.15 3619.42,4308.55 3619.42,5018.55 SEG4.9

## Silkscreen, mask and mechanical layers (free items; w line width, h text height)
Top Overlay:
  text "CD4025BE" at 4354.41,5313.23 h40.63
  text "SN74HC47" at 1584.1,4158.54 h40.63 r270
  text "CD4585BE" at 3659.41,3813.54 h80 r270
  text "1" at 4929.41,3283.86 h40.63 r180
  text "2" at 5029.41,3283.86 h40.63 r180
  text "3" at 5124.41,3283.86 h40.63 r180
  text "SN74LS160" at 1534.1,3223.54 h40.63 r270
  text "2" at 5024.41,2953.86 h40.63 r180
  text "3" at 5129.41,2953.86 h40.63 r180
  text "1" at 4929.41,2948.86 h40.63 r180
  text "A" at 4932.13,2647.51 h40.63 r201
  text "B" at 5039.41,2643.86 h40.63 r180
  text "Y" at 5131.69,2642.51 h40.63 r159
  text "SN7400N" at 1974.41,2588.22 h40.63
  text "SN7404N" at 2864.41,2578.22 h40.63
  text "1" at 4669.41,2108.86 h40.63 r180
  text "2" at 4764.41,2108.86 h40.63 r180
  text "3" at 4864.41,2108.86 h40.63 r180
  text "4" at 4971.35,2104.98 h40.63 r144
  text "1" at 3119.41,2093.86 h40.63 r180
  text "2" at 3209.41,2093.86 h40.63 r180
  text "VCC" at 4029.41,2073.22 h40.63
  text "GND" at 4199.41,2068.22 h40.63
  text "1" at 3124.41,1843.86 h40.63 r180
  text "2" at 3214.41,1843.86 h40.63 r180
  text "1" at 4669.41,1843.86 h40.63 r180
  text "2" at 4764.41,1843.86 h40.63 r180
  text "3" at 4864.41,1843.86 h40.63 r180
  text "4" at 4971.35,1839.98 h40.63 r144

## Text inside footprints (layer, text, board x,y; h text height)
BUZZER2: Top Overlay "-" at 5153.41,4859.54 h60 r90; Top Overlay "蜂鸣器" at 4959.41,5033.54 h62.99; Top Overlay "+" at 4904.2,4880.75 h60 r225; Top Overlay "有源" at 4151.89,4509.87 h59.05